# EAGLE board eib_v1.0 (EAGLE 5.03)
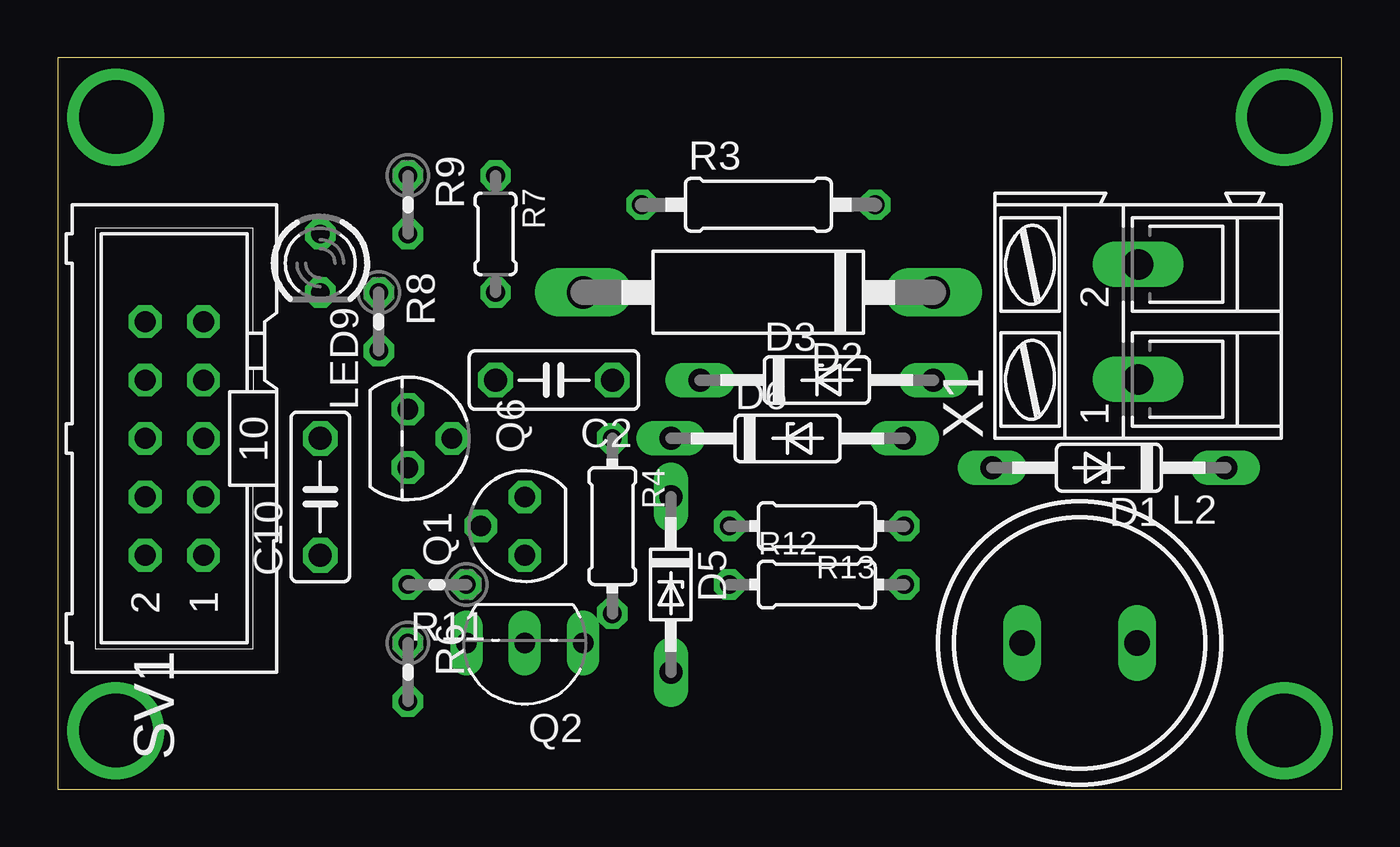
[diagram p0: board, top side]
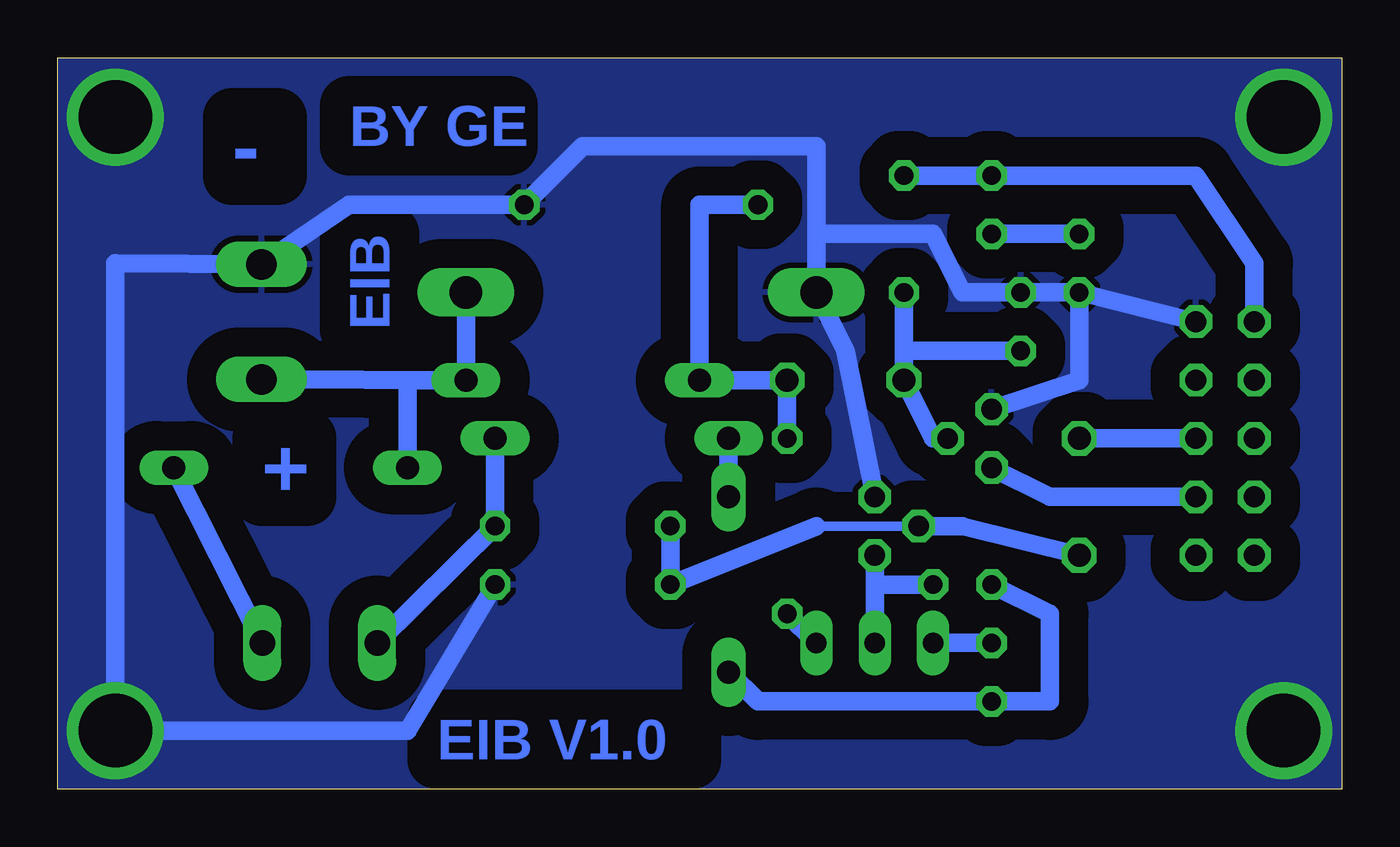
[diagram p1: board, bottom side, seen from below]

Size 55.86 x 31.8 mm. Coordinates in mm from the lower left corner, seen from the top.
Outline: 0,0 55.86,0 55.86,31.8 0,31.8 0,0
Copper layers (1*16): Top 0.035mm / dielectric 1.5mm / Bottom 0.035mm
Design rules "0.35mm": minimum track width 10mil, minimum drill 24mil, track to track 0.35mm, track to pad 0.35mm, pad to pad 0.35mm, via to via 0.35mm, smd to smd 0.35mm, copper to edge 0mil, drill to drill 8mil, minimum pad ring 10mil, minimum via ring 8mil, stop-mask expansion 4mil, vias tented up to drill 0mil, thermal gap 10mil
Net classes: 1 supply: width 0.406 mm

## Footprints (pad centres in the part's own frame; a part is rotated, then mirrored left to right if it is on the bottom)
C050-025X075 = drill 1 octagon: 1 -2.54,0; 2 2.54,0
DO35Z10 = drill 1 long: A 5.08,0; C -5.08,0
C1702-15 = drill 1.4 long: A 7.62,0; C -7.62,0
DO34Z7 = drill 1 long: A 3.81,0; C -3.81,0
SD12_1000 = drill 1.1 long: 1 -2.5,0; 2 2.5,0
LED3MM = drill 0.813 octagon: A -1.27,0; K 1.27,0
TO92 = drill 0.9 octagon: 1 1.27,0; 2 0,1.905; 3 -1.27,0
TO92-BCE = drill 0.9 long: B 2.54,0; C 0,0; E -2.54,0
SOT54E = drill 0.9 octagon: D -1.27,0; G 0,1.905; S 1.27,0
0207/10 = drill 0.813 octagon: 1 -5.08,0; 2 5.08,0
0204/7 = drill 0.813 octagon: 1 -3.81,0; 2 3.81,0
0204V = drill 0.813 octagon: 1 -1.27,0; 2 1.27,0
0204/5 = drill 0.813 octagon: 1 -2.54,0; 2 2.54,0
ML10 = drill 0.914 octagon: 1 -5.08,-1.27; 2 -5.08,1.27; 3 -2.54,-1.27; 4 -2.54,1.27; 5 0,-1.27; 6 0,1.27; 7 2.54,-1.27; 8 2.54,1.27; 9 5.08,-1.27; 10 5.08,1.27
AK300/2 = drill 1.321 long: 1 -2.515,0; 2 2.489,0

## Placement (x,y rotation side)
C2  100n  [C050-025X075]  21.59,17.78 180 top
C10  100n  [C050-025X075]  11.43,12.7 90 top
D1  BAT46  [DO35Z10]  45.72,13.97 180 top
D2  P6KE39A  [C1702-15]  30.48,21.59 180 top
D3  BAT46  [DO35Z10]  33.02,17.78 0 top
D5  8v2  [DO34Z7]  26.67,8.89 270 top
D6  BAT46  [DO35Z10]  31.75,15.24 0 top
L2  150mH  [SD12_1000]  44.45,6.35 0 top
LED9  Led 3mm  [LED3MM]  11.43,22.86 270 top
Q1  BC557  [TO92]  15.24,15.24 270 top
Q2  BC640  [TO92-BCE]  20.32,6.35 180 top
Q6  BS170  [SOT54E]  20.32,11.43 90 top
R3  100k  [0207/10]  30.48,25.4 0 top
R4  12R  [0204/7]  24.13,11.43 270 top
R6  100R  [0204V]  15.24,5.08 270 top
R7  82k  [0204/5]  19.05,24.13 270 top
R8  47k  [0204V]  13.97,20.32 270 top
R9  1K  [0204V]  15.24,25.4 270 top
R11  5k6  [0204V]  16.51,8.89 180 top
R12  12k  [0204/7]  33.02,8.89 0 top
R13  220k  [0204/7]  33.02,11.43 180 top
SV1  PD  [ML10]  5.08,15.24 90 top
X1  AK300/2  [AK300/2]  46.99,20.32 90 top

## Library data of the parts
C2 C10 R3 R4 R6-R9 R11-R13 = rcl
D1-D3 D5 D6 = diode
L2 = inductor-neosid
LED9 = led
Q1 Q2 = transistor-pnp
Q6 = transistor-small-signal
SV1 = con-harting-ml
X1 = con-ptr500

## Nets
+5V: R7.1 R9.1 SV1.10
EIB+: D1.A D2.C D3.A X1.1
EIB_IN: Q1.1 SV1.3
EIB_OUT: C10.2 SV1.5
GND: D2.A LED9.K Q1.3 Q6.S R3.2 R8.1 R12.2 SV1.9 X1.2
N$1: Q2.E R4.2
N$2: D5.C D6.C
N$3: C10.1 Q6.G R12.1 R13.2
N$4: Q2.B R6.1
N$5: Q2.C Q6.D R11.1
N$6: D1.C L2.2
N$7 [supply]: C2.2 Q1.2 R7.2 R8.2
N$10: D5.A R6.2 R11.2
N$25: LED9.A R9.2
V+: C2.1 D3.C R3.1 R4.1
VDC [supply]: D6.A L2.1 R13.1

## Tracks (layer width: path | path; a pad name or v marks a point on that pad's centre or on a via)
+5V
  Bottom 0.813: SV1.10 3.81,22.86 6.35,26.67 R9.1 R7.1
EIB+
  Bottom 0.813: D3.A D2.C D3.A | D3.A X1.1 | D1.A 40.64,17.78 D3.A
EIB_IN
  Bottom 0.813: Q1.1 12.7,12.7 SV1.3
EIB_OUT
  Bottom 0.813: SV1.5 C10.2
GND  (via drill 3.2)
  Bottom 0.813: SV1.9 LED9.K | LED9.K R8.1 16.51,21.59 17.78,24.13 22.86,24.13 | Q1.3 11.43,17.78 LED9.K | 22.86,24.13 22.86,27.94 33.02,27.94 R3.2 43.18,25.4 X1.2 53.34,22.86 v53.34,2.54 40.64,2.54 R12.2 | Q6.S 21.59,19.05 D2.A 22.86,24.13
  other vias: 53.34,29.21 2.54,29.21 2.54,2.54
  pour Bottom (isolate 1.27): 0,0 55.88,0 55.88,31.75 0,31.75
N$1
  Bottom 0.813: Q2.E R4.2
N$2
  Bottom 0.813: D5.C D6.C
N$3
  Bottom 0.406: Q6.G 22.86,11.43
  Bottom 0.813: C10.1 16.51,11.43 Q6.G | R12.1 R13.2 R12.1 | 22.86,11.43 R12.1
N$4
  Bottom 0.813: R6.1 Q2.B
N$5
  Bottom 0.813: 20.32,8.89 Q2.C | 20.32,8.89 Q6.D | R11.1 20.32,8.89
N$6
  Bottom 0.813: L2.2 D1.C
N$7
  Bottom 0.813: 19.05,19.05 R7.2 | R8.2 19.05,19.05 | 19.05,19.05 C2.2 17.78,15.24 Q1.2
N$10
  Bottom 0.813: R11.2 12.7,7.62 12.7,3.81 R6.2 25.4,3.81 D5.A
N$25
  Bottom 0.813: LED9.A R9.2
V+
  Bottom 0.813: R3.1 27.94,25.4 D3.C C2.1 R4.1
VDC
  Bottom 0.813: L2.1 R13.1 D6.A

## Text on the board
Bottom: BY GE | - | EIB | + | EIB V1.0